# Altium PCB PCB2.PcbDoc
Units mil, origin at the board's own origin, x right, y up, seen from the top; angles counter-clockwise.
Board outline 2430 x 1370 mil, 2 copper layers (Top Layer, Bottom Layer); 12 components, 7 nets, 31 pads, 0 vias.
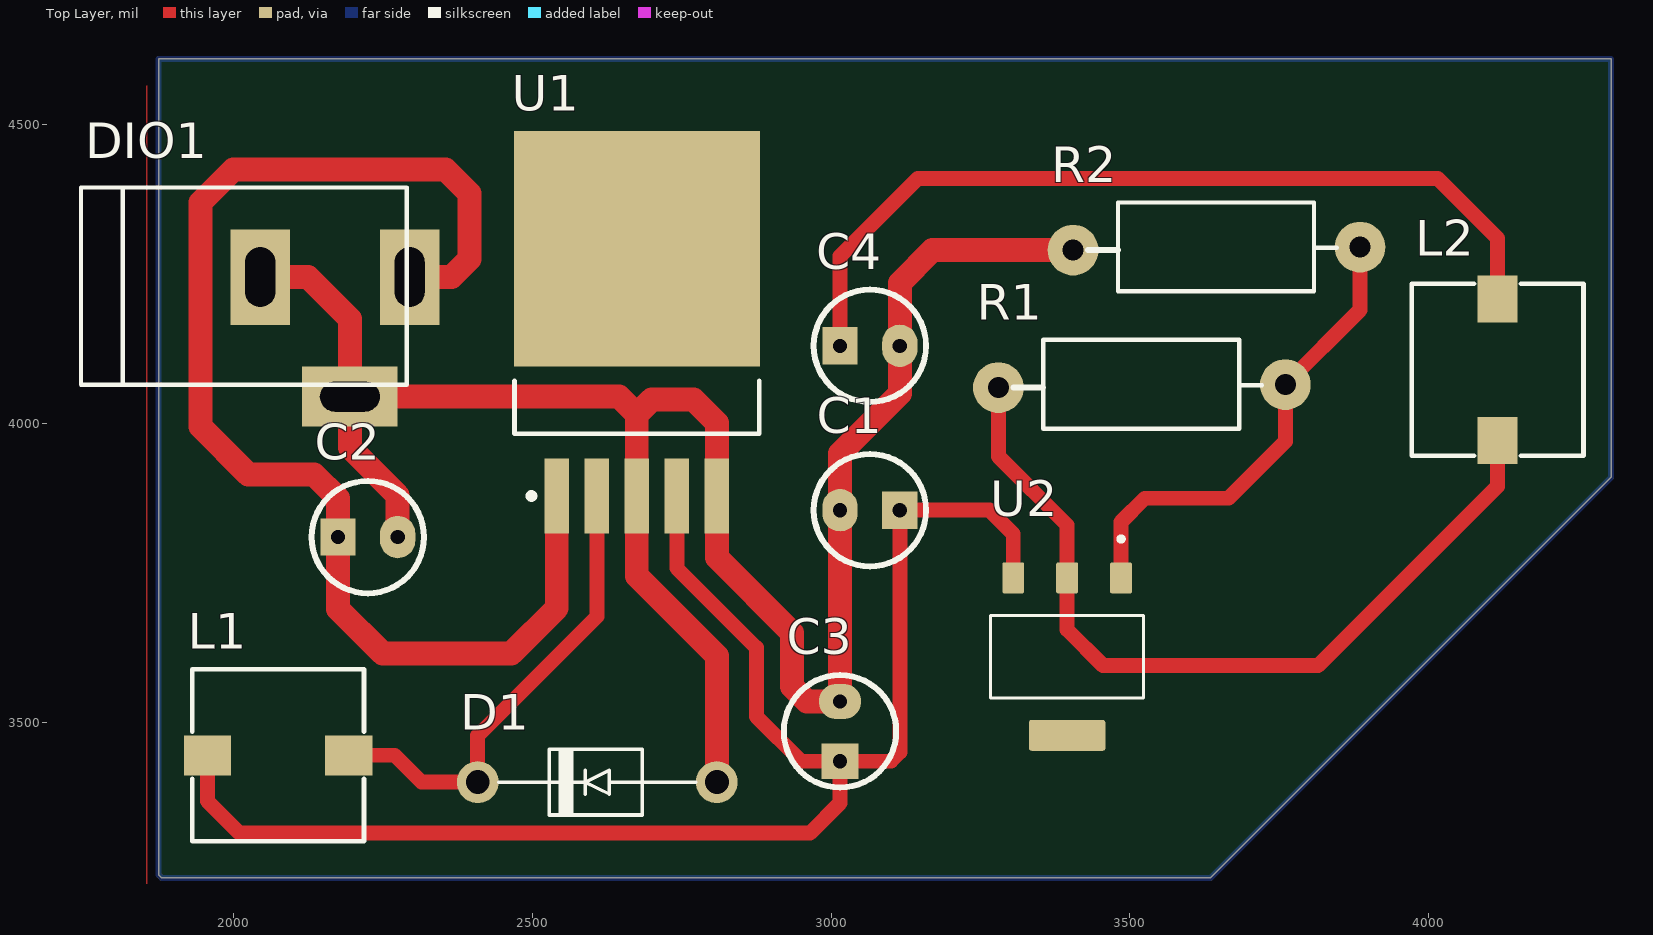
[diagram p0: Top Layer view]
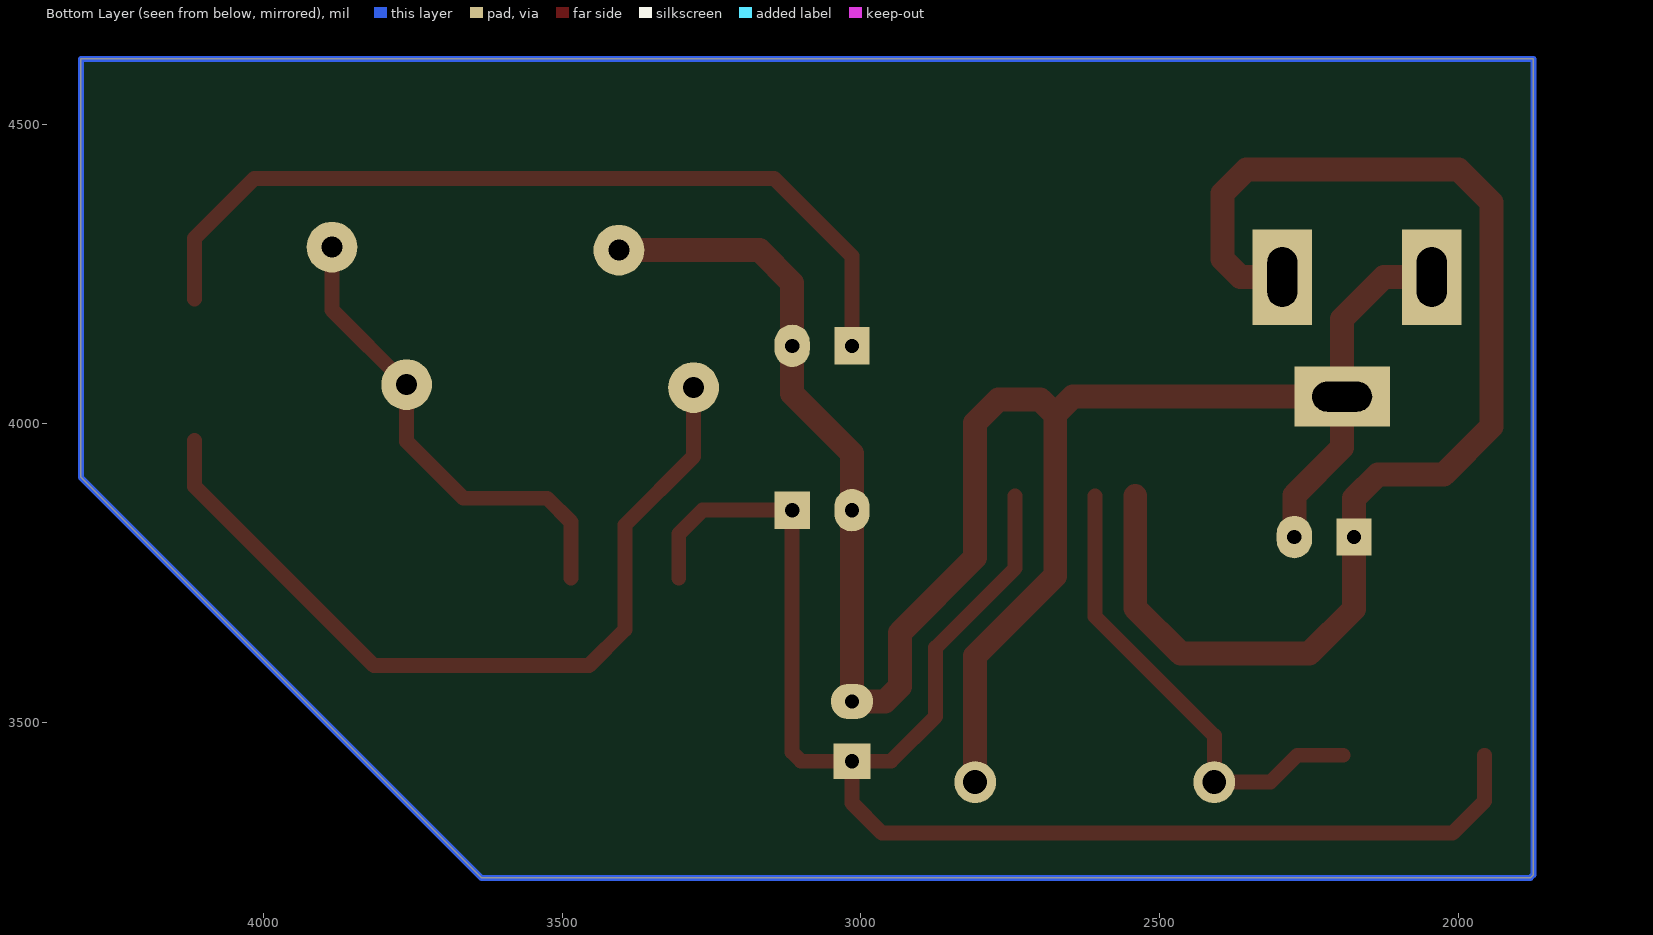
[diagram p1: Bottom Layer view, seen from below]
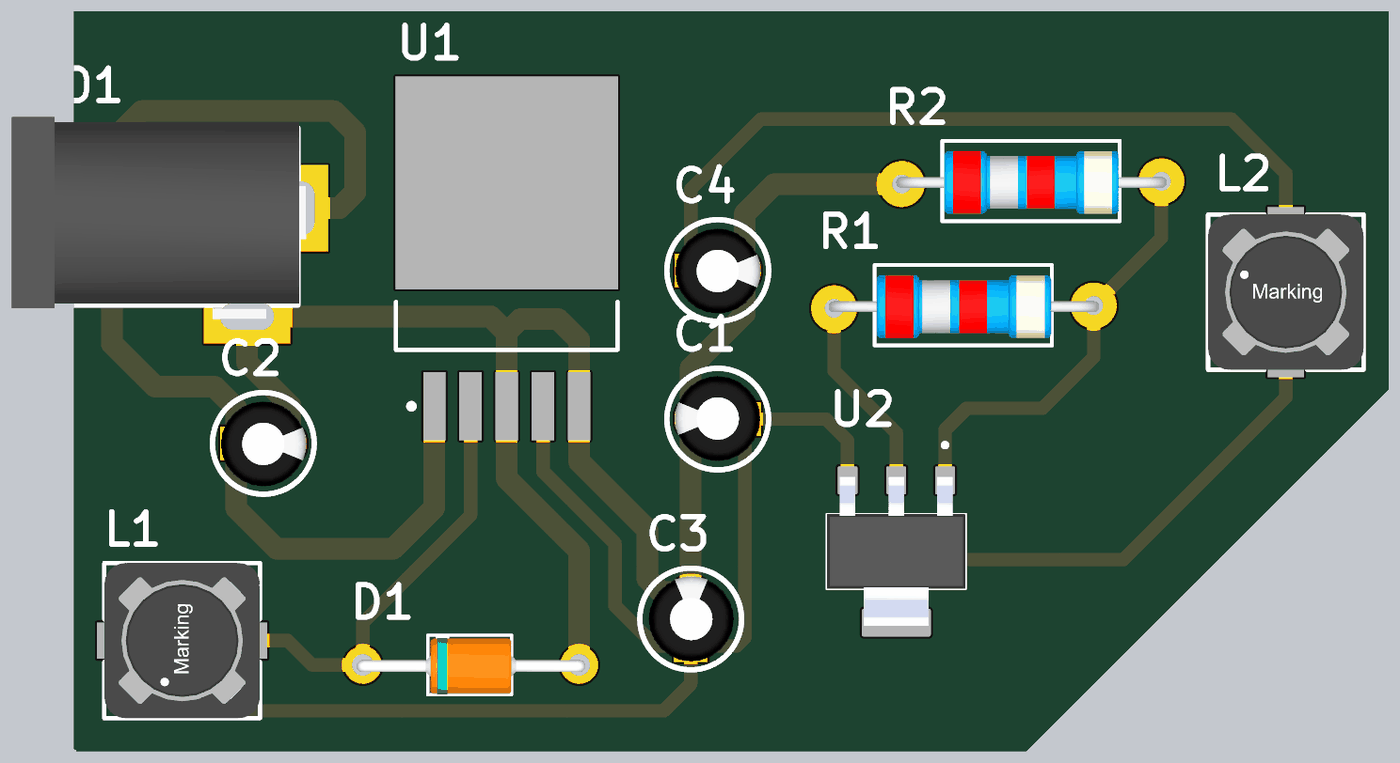
[diagram p2: 3D render of the assembled board from above, using the file's embedded part models]

## Layer stack, top to bottom
Top Solder: solder mask 0.4, Solder Resist, Dk 3.5
Top Layer: signal copper 1.4
Dielectric 1: dielectric 12.6, FR-4, Dk 4.8
Bottom Layer: signal copper 1.4
Bottom Solder: solder mask 0.4, Solder Resist, Dk 3.5

## Board outline
1880,3240 1875,3245 1875,4610 4305,4610 4305,3910 3635,3240

## Design rules (kind name [scope] priority, off if disabled: settings)
Clearance [All] p1: gap=10 ignorepadtopadclearanceinfootprint=FALSE
PolygonConnect [All] p1: connectstyle=Relief reliefconductorwidth=10 reliefentries=4 polygonreliefangle="90 Angle" airgapwidth=10
RoutingVias [All] p1: holewidth=28 width=50 viastyle="Through Hole" minholewidth=28 minwidth=50 maxholewidth=28 maxwidth=50
SolderMaskExpansion [All] p1: expansion=4
Width [All] p1: maxlimit=40 minlimit=10 preferedwidth=25 minimp=50.000000 maximp=50.000000 favimp=50.000000
30 further rules are at their usual default settings.

## Components (designator, comment, footprint, x,y, rotation, side; value= is the part's Value field where it differs from the comment)
C1 "CAP-ALU-DIP" CA-ALU-2.54 3065,3855 r180 top value=104
C2 "CAP-ALU-DIP" CA-ALU-2.54 2225,3810 r0 top value=104
C3 "CAP-ALU-DIP" CA-ALU-2.54 3015,3485 r90 top value=104
C4 "CAP-ALU-DIP" CA-ALU-2.54 3065,4130 r0 top value=104
D1 "Diode" DIO-1A 2808.86,3400 r180 top value=1N5007
DIO1 "Jac DC" DC-IN 2170,4145 r0 top
L1 "150mH" L-SMD-M-7.3x4.5 2075,3445 r270 top value="150 mH"
L2 "150mH" L-SMD-M-7.3x4.5 4115,4090 r180 top value="150 mH"
R1 "150" RES-1/2W 3500,4065 r0 top value="R1/4W - 1K"
R2 "130" RES-1/2W 3625,4295 r0 top value="R1/4W - 1K"
U1 "LM2596" TO-263 2675,4115 r90 top
U2 "ams1117" SOT229P700X180-4N 3395,3610 r270 top

## Footprints (in the part's own frame and the unit in brackets; to place one, negate y for a bottom-side part, rotate by r counter-clockwise, add the part's x,y. Pads: shape width x height; smd on the part's side, far side on the other; paste and mask are expansions set on the pad)
CA-ALU-2.54 [mm]
  rect 1.5x1.58 hole 0.6: 1(-1.27,0)
  oval 1.5x1.8 hole 0.6: 2(1.27,0)
  silkscreen extent -2.39,-2.39 2.39,2.39, body extent -2,-2.03 1.99,1.97, height 7.01
DC-IN [mil] "Jac DC input"
  rect 100x160 hole 50 slot 100 at 90 deg: 1(125,100) 2(-125,100)
  rect 160x100 hole 50 slot 100 at 0 deg: 3(25,-100)
  silkscreen extent -425,-80 120,250, body extent -410,-105 134,269, height 434
DIO-1A [mil]
  round 70 hole 40: 1(0,0) 2(400,0)
  silkscreen extent 35,-55 365,55, body extent -11,-50 411,54, height 102
L-SMD-M-7.3x4.5 [mm] "WE-PDA SMD Shielded Power Inductor, 7345"
  rect 1.7x2 smd: 1(0,3) 2(0,-3)
  silkscreen extent -3.65,-3.65 3.65,3.65, body extent -3.65,-3.65 3.65,3.65, height 4.05
RES-1/2W [mil]
  round 85 hole 35: 1(-220,-5) 2(260,0)
  silkscreen extent -195,-74 221,75, body extent -230,-60 270,56, height 121
SOT229P700X180-4N [mm]
  rrect15% 1.31x0.93 smd: 1(-3.345,2.29) 2(-3.345,0) 3(-3.345,-2.29)
  rrect15% 1.31x3.24 smd: 4(3.345,0)
  silkscreen extent -5.1,-3.25 1.75,3.25, body extent -3.5,-3.25 3.5,3.25, height 1.8
TO-263 [mm]
  rect 3.2x1.05 smd: 1(-6,3.4) 2(-6,1.7) 3(-6,0) 4(-6,-1.7) 5(-6,-3.4)
  rect 10x10.45 smd: 6(4.5,0)
  silkscreen extent -6.12,-5.2 -1.1,5.2, body extent -6.58,-5.2 7.57,5.2, height 4.65

## Part data
C1 C2 C3 C4: "Capacitor (Semiconductor SIM Model)", LatestRevisionDate=17-Jul-2002, LatestRevisionNote="Re-released for DXP Platform.", PackageReference=C1206, Publisher="Altium Limited"
D1: "Default Diode", Code - JEDEC=DO-214-AB, Published=8-Jun-2000, Publisher="Altium Limited", Revision="July-2002: Re-released for DXP Platform."
DIO1: library part DCIN, "Jac DC input"
L1 L2: library part "Inductor Ferit", "Inductor"
R1 R2: library part "Resistor - DIP", "Resistor - DIP"
U1: Max Input Voltage="12 V", Max Output Current="3 (6.0 peak) A", Max Output Voltage=mV, Temperature Range="-40 to +125 degC", Category=IC-Power, Min Input Voltage=mV, Min Output Voltage=mV, Mounting Technology="Surface Mount", Status=Unreleased, Supply Voltage=mV

## Nets (pads, with @x,y where several pads share a name; then routed paths per layer and width w, separated by ;. In a path a pad name is that pad's centre, name@x,y a point inside that pad or via, vN(x,y) a via of type N, cw(c..) or ccw(c..) an arc to the next point about the centre after c; other vN are vias at no path point)
3V3: C4.1 L2.2 | length 1447.2
  Top Layer w25: C4.1 3015,4280 3145,4410 4015,4410 4115,4310 L2.2
+5: C1.1 C3.1 L1.2 U1.4 U2.3 | length 2633.7
  Top Layer w25: L1.2 1956.89,3368.11 2010,3315 2965,3315 3015,3365 C3.1 ; U1.4 2741.93,3758.07 2875,3625 2875,3510 2950,3435 C3.1 ; U2.3 3304.84,3815.16 3265,3855 C1.1 3115,3450 3100,3435 C3.1
+12: C2.1 DIO1.1 U1.1 | length 2167.9
  Top Layer w40: DIO1.1 2365,4245 2395,4275 2395,4385 2355,4425 2000,4425 1945,4370 1945,3995 2025,3915 2135,3915 2175,3875 C2.1 2175,3690 2250,3615 2465,3615 2541.14,3691.14 U1.1
GND: C1.2 C2.2 C3.2 C4.2 D1.1 DIO1.2 DIO1.3 R2.1 U1.3 U1.5 | length 3538.3
  Top Layer w40: DIO1.2 2125,4245 2195,4175 DIO1.3 ; C2.2 2275,3880 2195,3960 DIO1.3 ; D1.1 2808.86,3611.14 2675,3745 U1.3 2675,4015 ; R2.1 3170,4290 3115,4235 C4.2 3115,4050 3015,3950 C1.2 C3.2 2960,3535 2935,3560 2935,3650 2808.86,3776.14 U1.5 2808.86,4001.14 2770,4040 2700,4040 2675,4015 ; DIO1.3 2645,4045 2675,4015
NetD1_2: D1.2 L1.1 U1.2 | length 795.7
  Top Layer w25: L1.1 2270,3445 2315,3400 D1.2 2408.86,3477.72 2608.07,3676.93 U1.2
NetL2_1: L2.1 R1.1 U2.2 | length 1398.6
  Top Layer w25: R1.1 3280,3945 3395,3830 U2.2 3395,3655 3455,3595 3815,3595 4115,3895 L2.1
NetR1_2: R1.2 R2.2 U2.1 | length 800.9
  Top Layer w25: U2.1 3485.16,3835.16 3525,3875 3665,3875 3760,3970 R1.2 3885,4190 R2.2
pads on no net: U1.6 U2.4
copper on no net: | length 7204.6
  Bottom Layer w10: 1875,3245 1875,4610 4305,4610 4305,3910 3635,3240 1880,3240 1875,3245

## Polygon pours and split planes (outlines as drawn)
no net on Top Layer "Top Layer-No Net" (solid, pour order 0): 1855,4565 1855,3230